# Allegro board RPI-CMCDA-V1_1-PUBLIC.brd
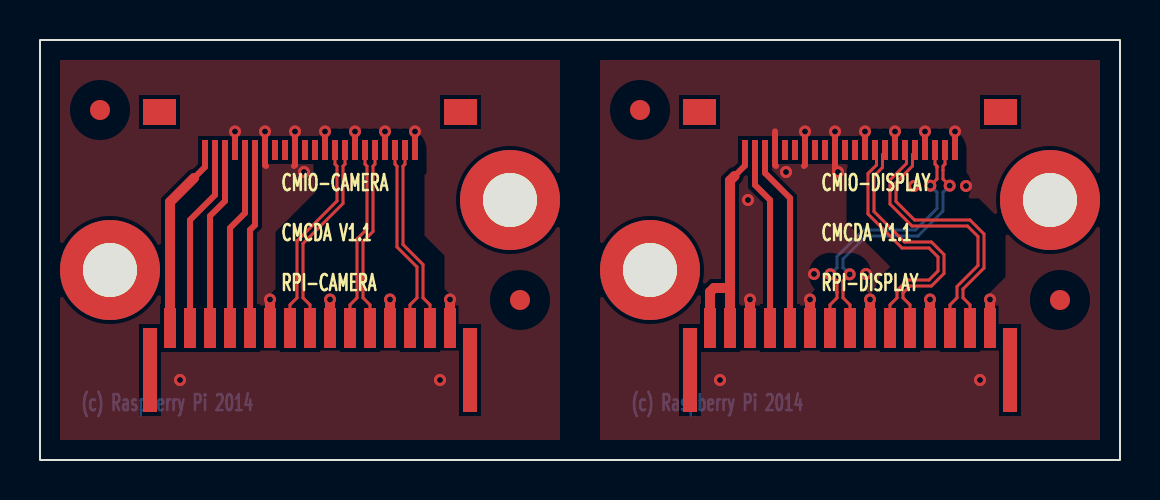
[diagram p0: board, top side]
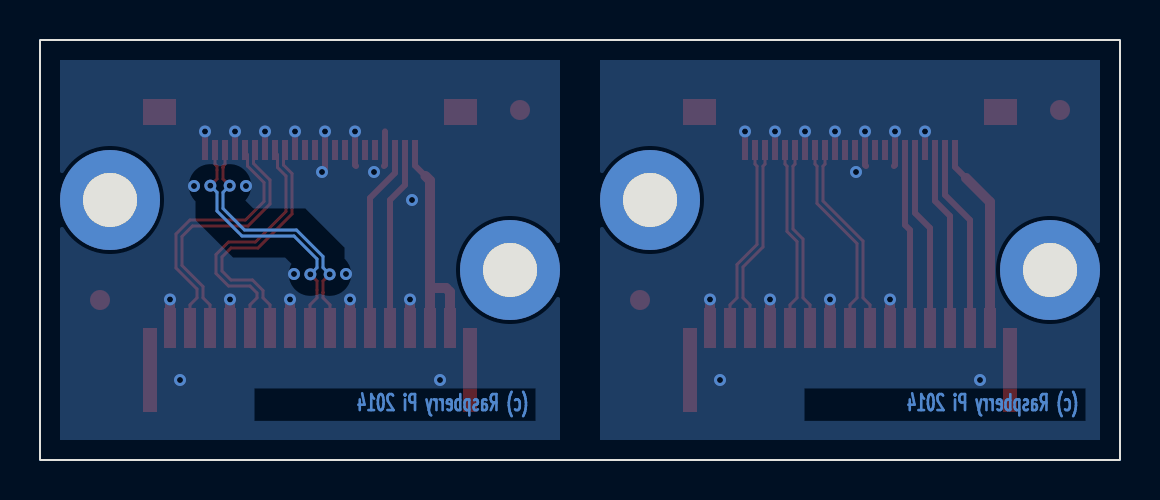
[diagram p1: board, bottom side, seen from below]

Outline 54 x 21 mm; copper layers: TOP, GND1, GND2, BOTTOM. Coordinates in mm from the lower left corner of the outline.
Outline path: rectangle 0,0 54,21

## Design rules (mm)
net group CAM_CK: nets CAM_CK_N CAM_CK_P
net group CAM_D0: nets CAM_D0_N CAM_D0_P
net group CAM_D1: nets CAM_D1_N CAM_D1_P
net group DISP_CK: nets DISP_CK_N DISP_CK_P
net group DISP_D0: nets DISP_D0_N DISP_D0_P
net group DISP_D1: nets DISP_D1_N DISP_D1_P

## Placement (name value [footprint] x y rotation side)
J1  54548-2271  [MOLEX_54548-2271]  13.5 15.5 180 top
J2  SFW15R-1STE1LF  [FCI_SFW15R-1STE1LF]  13.5 4.5 0 top
J3  54548-2271  [MOLEX_54548-2271]  40.5 15.5 180 top
J4  SFW15R-1STE1LF  [FCI_SFW15R-1STE1LF]  40.5 4.5 0 top
NOREF  -  [unnamed]  23.5 13 0 top
NOREF#2  -  [unnamed#2]  30 17.5 0 top
NOREF#3  -  [#2]  73 0 0 top
NOREF#4  -  [unnamed]  50.5 13 0 top
NOREF#5  -  [unnamed#2]  51 8 0 top
NOREF#6  -  [#2]  0 40 0 top
NOREF#7  -  [unnamed]  3.5 9.5 0 top
NOREF#8  -  [#2]  71 82 0 top
NOREF#9  -  [#2]  0 21 0 top
NOREF#10  -  [unnamed]  30.5 9.5 0 top
NOREF#11  -  [#2]  0 92 0 top
NOREF#12  -  [unnamed#2]  24 8 0 top
NOREF#13  -  [unnamed#2]  3 17.5 0 top
NOREF#14  -  [#2]  71 40 0 top
NOREF#15  -  [#2]  54 0 90 top

## Library data of the parts
J1 J3 = CON_22W_FFC_54548-2271
J2 J4 = CON_FPC_15W_VERT

## Footprints (pads in the part's own frame, mm; a bottom-side part is the same pattern mirrored in y, then rotated)
FCI_SFW15R-1STE1LF
  rect 0.7x4.2 smd: (-8,0) (8,0)
  rect 0.6x2 smd: 1(7,2.1) 2(6,2.1) 3(5,2.1) 4(4,2.1) 5(3,2.1) 6(2,2.1) 7(1,2.1) 8(0,2.1) 9(-1,2.1) 10(-2,2.1) 11(-3,2.1) 12(-4,2.1) 13(-5,2.1) 14(-6,2.1) 15(-7,2.1)
MOLEX_54548-2271
  rect 1.65x1.3 smd: (-7.525,-1.9) (7.525,-1.9)
  rect 0.3x1 smd: 1(-5.25,0) 2(-4.75,0) 3(-4.25,0) 4(-3.75,0) 5(-3.25,0) 6(-2.75,0) 7(-2.25,0) 8(-1.75,0) 9(-1.25,0) 10(-0.75,0) 11(-0.25,0) 12(0.25,0) 13(0.75,0) 14(1.25,0) 15(1.75,0) 16(2.25,0) 17(2.75,0) 18(3.25,0) 19(3.75,0) 20(4.25,0) 21(4.75,0) 22(5.25,0)
unnamed
  round 5 hole 2.7: (0,0)
unnamed#2
  round 1 smd: (0,0)

## Nets
CAM_3V3: J1.22(P22) J2.15(P15)
CAM_CK_N: J1.8(P8) J2.8(P8)
CAM_CK_P: J1.9(P9) J2.9(P9)
CAM_D0_N: J1.2(P2) J2.2(P2)
CAM_D0_P: J1.3(P3) J2.3(P3)
CAM_D1_N: J1.5(P5) J2.5(P5)
CAM_D1_P: J1.6(P6) J2.6(P6)
CAM_GND: J1.1(P1) J1.4(P4) J1.7(P7) J1.10(P10) J1.13(P13) J1.16(P16) J1.19(P19) J2.1(P1) J2.4(P4) J2.7(P7) J2.10(P10)
CAM_IO0: J1.17(P17) J2.11(P11)
CAM_IO1: J1.18(P18) J2.12(P12)
CAM_SCL: J1.20(P20) J2.13(P13)
CAM_SDA: J1.21(P21) J2.14(P14)
DISP_3V3: J3.22(P22) J4.14(P14) J4.15(P15)
DISP_CK_N: J3.8(P8) J4.5(P5)
DISP_CK_P: J3.9(P9) J4.6(P6)
DISP_D0_N: J3.2(P2) J4.8(P8)
DISP_D0_P: J3.3(P3) J4.9(P9)
DISP_D1_N: J3.5(P5) J4.2(P2)
DISP_D1_P: J3.6(P6) J4.3(P3)
DISP_GND: J3.1(P1) J3.4(P4) J3.7(P7) J3.10(P10) J3.13(P13) J3.16(P16) J3.19(P19) J4.1(P1) J4.4(P4) J4.7(P7) J4.10(P10) J4.13(P13)
DISP_SCL: J3.20(P20) J4.11(P11)
DISP_SDA: J3.21(P21) J4.12(P12)

Pads without a net: J1 11 12 14 15; J3 11 12 14 15 17 18

## Via types
v1: diameter 0.6, hole 0.3, TOP to BOTTOM, 38 vias

## Routing (per net, layer and track width the routed paths; a pad name or vN(x,y) marks a point on that pad's centre or on a via; arc(x,y) is an arc through that point)
CAM_3V3: length 9.6
  TOP w0.3: J1.22 8.25,14.65 7.7,14.1
  TOP w0.5: J2.15 6.5,12.9 7.7,14.1
CAM_CK_N: length 9.9
  TOP w0.15: J2.8 13.5,7.76 13.15,8.11 13.15,10.83 15.15,12.83 15.15,14.69 15.25,14.79 J1.8
CAM_CK_P: length 9.9
  TOP w0.15: J2.9 12.5,7.76 12.85,8.11 12.85,10.95 14.85,12.95 14.85,14.69 14.75,14.79 J1.9
CAM_D0_N: length 9.5
  TOP w0.15: J1.2 18.25,14.79 18.15,14.69 18.15,10.77 19.15,9.77 19.15,8.11 19.5,7.76 J2.2
CAM_D0_P: length 9.5
  TOP w0.15: J1.3 17.75,14.79 17.85,14.69 17.85,10.65 18.85,9.65 18.85,8.11 18.5,7.76 J2.3
CAM_D1_N: length 9.3
  TOP w0.15: J2.5 16.5,7.76 16.15,8.11 16.15,10.93 16.65,11.43 16.65,14.69 16.75,14.79 J1.5
CAM_D1_P: length 9.3
  TOP w0.15: J2.6 15.5,7.76 15.85,8.11 15.85,11.05 16.35,11.55 16.35,14.69 16.25,14.79 J1.6
CAM_GND: length 13.8
  TOP w0.3: v1(12.75,16.43) J1.13 12.75,14.75 12.7,14.7 ; J1.7 v1(15.75,16.43) ; J1.1 v1(18.75,16.43) ; v1(11.25,16.43) J1.16 11.25,14.75 11.3,14.7 ; J1.4 v1(17.25,16.43) ; J1.19 v1(9.75,16.43) ; J1.10 v1(14.25,16.43)
  TOP w0.5: J2.1 v1(20.5,8.03) ; J2.10 v1(11.5,8.03) ; J2.4 v1(17.5,8.03) ; J2.7 v1(14.5,8.03)
  vias: v1(7,4) v1(13.2,14.4) v1(20,4)
CAM_IO0: length 9
  TOP w0.3: J2.11 10.5,11.5 10.75,11.75 J1.17
CAM_IO1: length 9.2
  TOP w0.3: J1.18 10.25,12.35 9.5,11.6 J2.12
CAM_SCL: length 9.2
  TOP w0.3: J2.13 8.5,12.2 9.25,12.95 J1.20
CAM_SDA: length 9.4
  TOP w0.3: J1.21 8.75,13.25 7.5,12 J2.14
DISP_3V3: length 12.1
  TOP w0.3: J3.22 35.25,14.72 34.73,14.2
  TOP w0.5: 34.73,14.2 34.5,13.97 34.5,8.6 ; J4.14 34.5,8.6 ; 34.5,8.6 33.7,8.6 33.5,8.4 J4.15
DISP_CK_N: length 13
  TOP w0.15: J4.5 43.5,7.76 43.15,8.11 43.15,8.35 43.5,8.7 44.57,8.7 45.2,9.33 45.2,10.27 44.57,10.9 43.22,10.9 41.7,12.42 41.7,14.2 42.12,14.62 42.12,15.27 42.25,15.39 J3.8
DISP_CK_P: length 13
  TOP w0.15: J4.6 42.5,7.76 42.85,8.11 42.85,8.47 43.38,9 44.45,9 44.9,9.45 44.9,10.15 44.45,10.6 43.1,10.6 41.4,12.3 41.4,14.32 41.83,14.75 41.83,15.43 J3.9
DISP_D0_N: length 13.2
  TOP w0.15: J3.2 45.25,14.79 45.15,14.69 45.15,14.5 45.15,14.05 v1(45.48,13.72) ; J4.8 40.5,7.76 40.15,8.11 40.15,8.5 40.15,8.95 v1(40.48,9.28)
  BOTTOM w0.15: v1(40.48,9.28) 40.15,9.62 40.15,10.05 41.3,11.2 43.9,11.2 45.15,12.45 45.15,13.38 v1(45.48,13.72)
DISP_D0_P: length 13.2
  TOP w0.15: J4.9 39.5,7.76 39.85,8.11 39.85,8.38 39.85,8.95 v1(39.52,9.28) ; J3.3 44.75,14.79 44.85,14.69 44.85,14.62 44.85,14.05 v1(44.52,13.72)
  BOTTOM w0.15: v1(39.52,9.28) 39.85,9.62 39.85,10.17 41.18,11.5 43.78,11.5 44.85,12.57 44.85,13.38 v1(44.52,13.72)
DISP_D1_N: length 13.3
  TOP w0.15: J4.2 46.5,7.76 46.15,8.11 46.15,8.55 47.2,9.6 47.2,11.3 46.5,12 43.72,12 42.8,12.92 42.8,13.88 43.62,14.7 43.62,15.27 43.75,15.39 J3.5
DISP_D1_P: length 13.3
  TOP w0.15: J4.3 45.5,7.76 45.85,8.11 45.85,8.67 46.9,9.72 46.9,11.18 46.38,11.7 43.6,11.7 42.5,12.8 42.5,14 43.33,14.82 43.33,15.43 J3.6
DISP_GND: length 16.4
  TOP w0.3: v1(39.75,16.43) J3.13 39.75,14.55 v1(39.9,14.4) ; 36.75,16.43 J3.19 36.75,14.75 36.8,14.7 ; J3.1 v1(45.75,16.43) ; J3.7 v1(42.75,16.43) ; 38.2,14.7 38.25,14.75 J3.16 v1(38.25,16.43) ; J3.10 v1(41.25,16.43) ; J3.4 v1(44.25,16.43)
  TOP w0.5: J4.7 v1(41.5,8.03) ; J4.4 v1(44.5,8.03) ; J4.1 v1(47.5,8.03) ; J4.10 v1(38.5,8.03) ; J4.13 v1(35.5,8.03)
  vias: v1(34,4) v1(35.4,13) v1(37.3,14.4) v1(38.7,9.3) v1(41.3,9.3) v1(43.7,13.7) v1(46.3,13.7) v1(47,4)
DISP_SCL: length 9.4
  TOP w0.3: J3.20 36.25,14.35 37.5,13.1 J4.11
DISP_SDA: length 9.2
  TOP w0.3: J4.12 36.5,13 35.75,13.75 J3.21

## Copper pours and planes (outline as drawn; the poured copper is in the pictures)
CAM_GND on TOP: 1,1 1,20 26,20 26,1 ; 6 cut-outs
CAM_GND on BOTTOM, GND1, GND2: 1,1 1,20 26,20 26,1
DISP_GND on TOP: 28,1 28,20 53,20 53,1 ; 1 cut-out
DISP_GND on BOTTOM: 28,1 28,20 53,20 53,1
DISP_GND on GND1, GND2: 28,1 28,20 53,20 53,1

## Text on the board
BOTTOM: (c) Raspberry Pi 2014
User.Comments: V-SCORE CENTRE LINE
Ref Des/Silkscreen Top: CMIO-CAMERA | CMCDA V1.1 | RPI-CAMERA | CMIO-DISPLAY | RPI-DISPLAY
NOTES: NONE
NCLEGEND-1-4: FIGURE | SIZE | 0.3 | 2.7 | DRILL CHART: TOP to BOTTOM | ALL UNITS ARE IN MILLIMETERS | PLATED | QTY | 38 | 4
